# Altium PCB BalanceCarCircuit.PcbDoc
Units mil, origin at the board's own origin, x right, y up, seen from the top; angles counter-clockwise.
Board outline 4000 x 2000 mil, 2 copper layers (Top Layer, Bottom Layer); 6 components, 17 nets, 70 pads, 5 vias.
Unrouted connection lines stored in the file: 5.
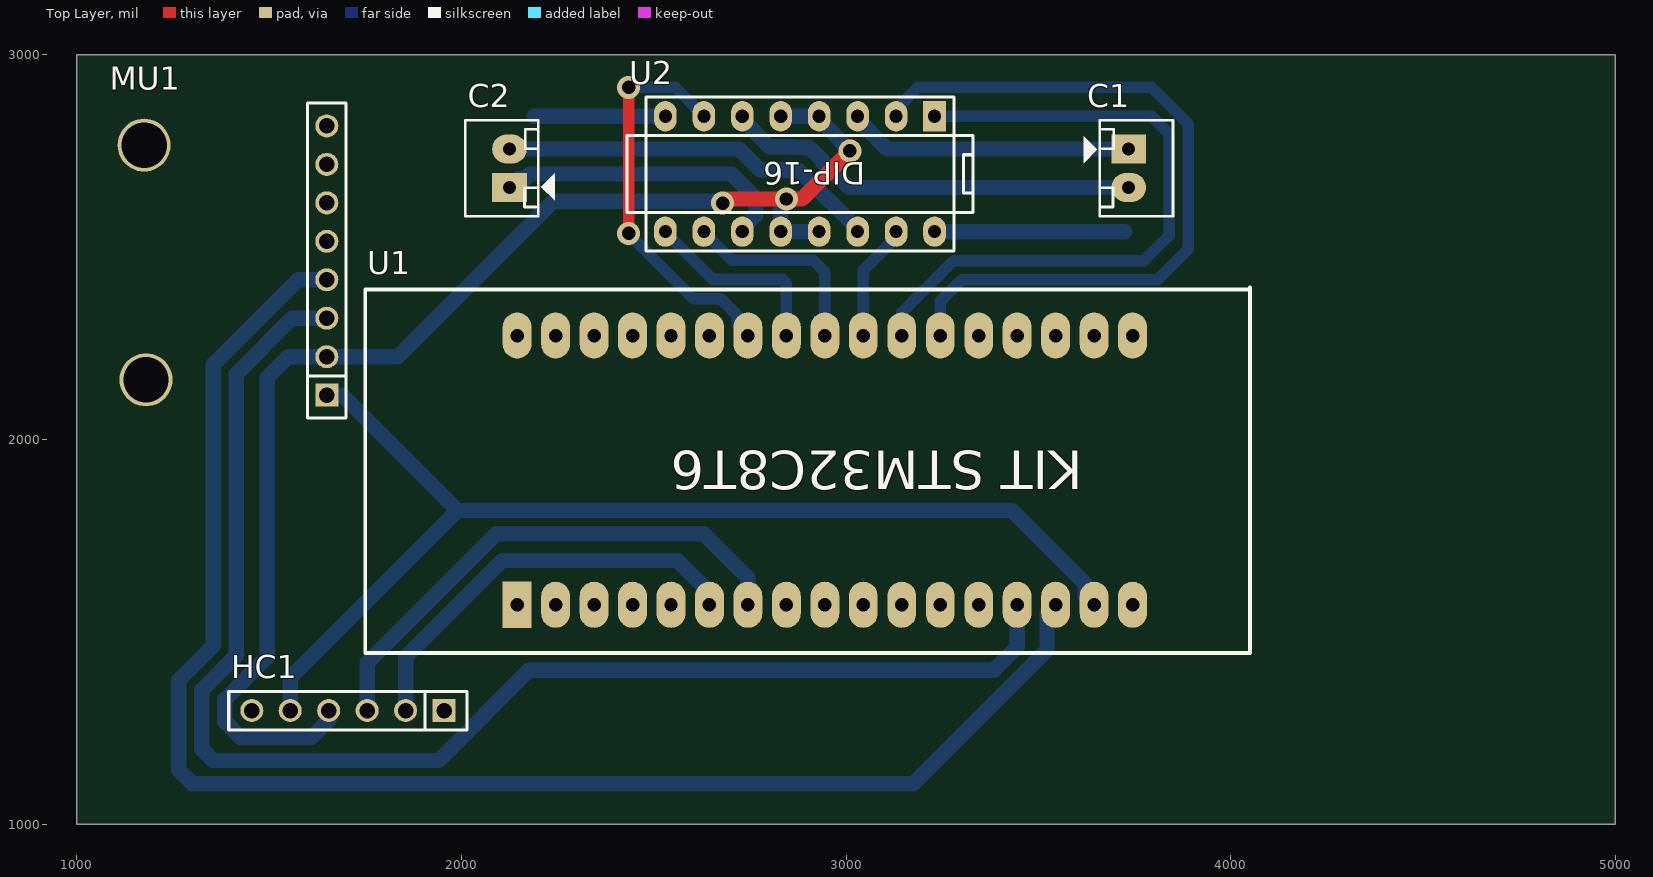
[diagram p0: Top Layer view]
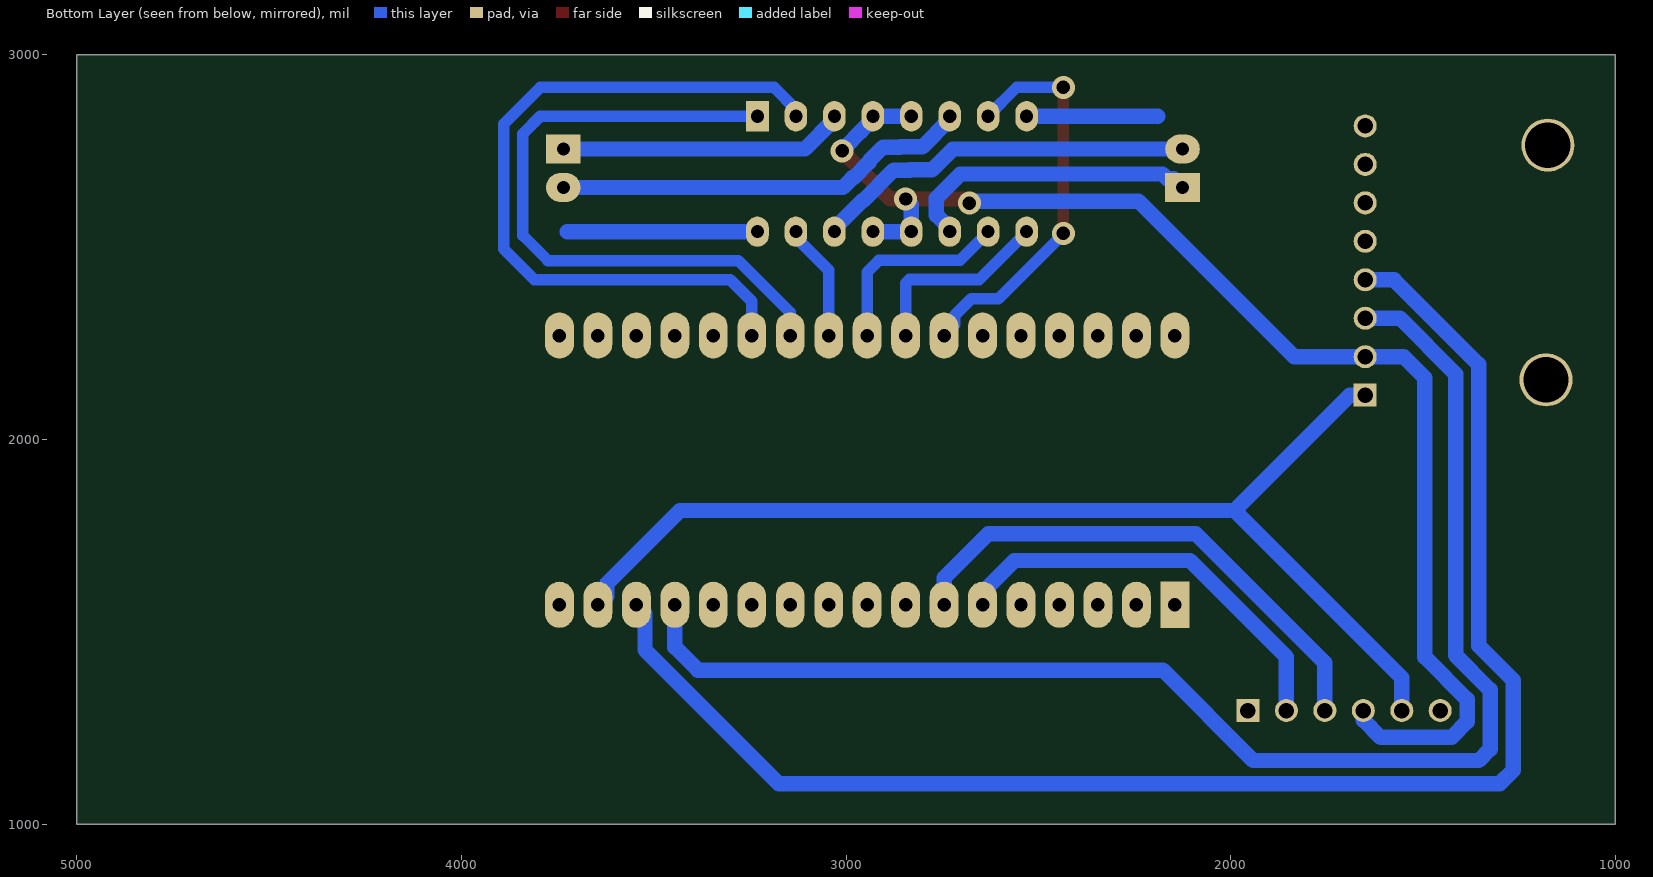
[diagram p1: Bottom Layer view, seen from below]
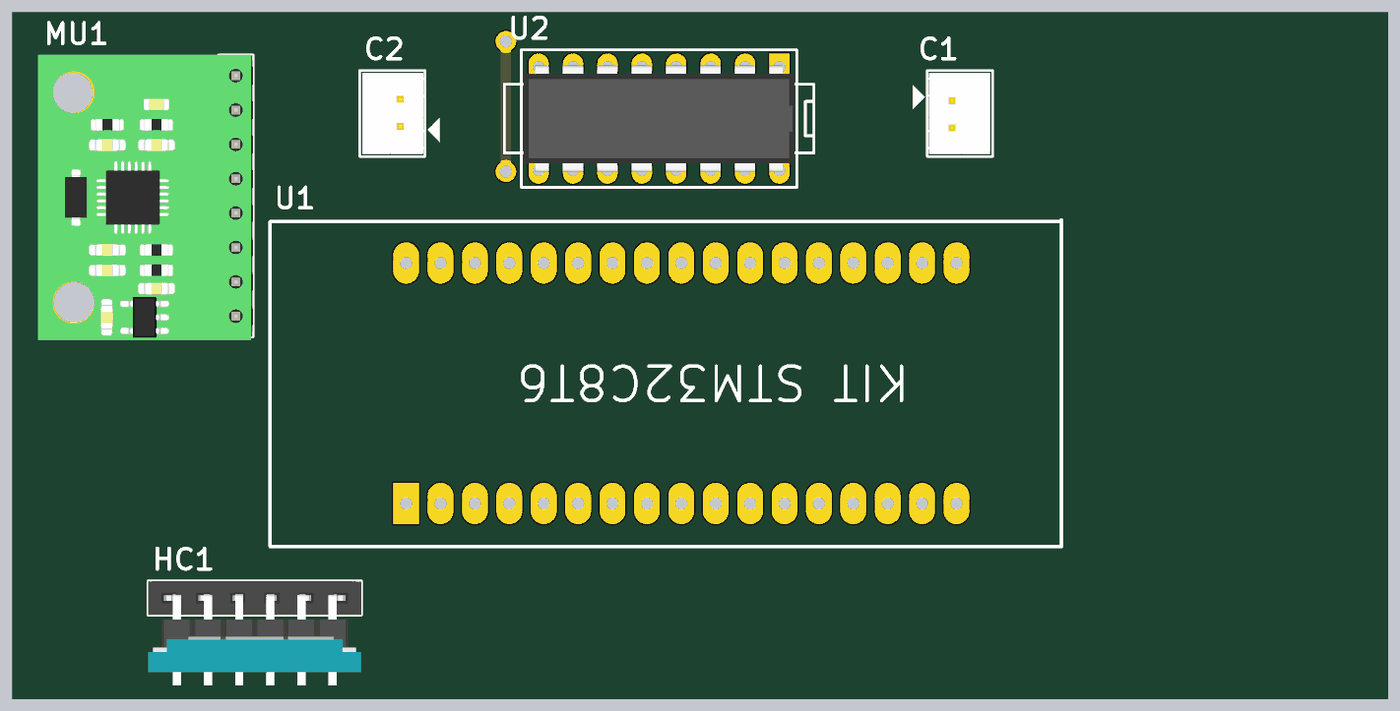
[diagram p2: 3D render of the assembled board from above, using the file's embedded part models]

## Layer stack, top to bottom
Top Solder: solder mask 0.4, Solder Resist, Dk 3.5
Top Layer: signal copper 1.4
Dielectric1: dielectric 12.6, FR-4, Dk 4.8
Bottom Layer: signal copper 1.4
Bottom Solder: solder mask 0.4, Solder Resist, Dk 3.5

## Board outline
1000,1000 5000,1000 5000,3000 1000,3000

## Design rules (kind name [scope] priority, off if disabled: settings)
Clearance [All] p1: gap=20
PolygonConnect [All] p1: connectstyle=Relief reliefconductorwidth=10 reliefentries=4 polygonreliefangle="90 Angle" airgapwidth=10
RoutingVias [All] p1: holewidth=35 width=60 viastyle="Through Hole" minholewidth=35 minwidth=60 maxholewidth=35 maxwidth=60
SilkToSolderMaskClearance SilkscreenOverComponentPads [IsPad] p1: minsilkscreentomaskgap=10 clearancetoexposedcopper=TRUE
SolderMaskExpansion [All] p1: expansion=4
Width [All] p1: maxlimit=50 minlimit=30 preferedwidth=40
29 further rules are at their usual default settings.

## Components (designator, comment, footprint, x,y, rotation, side; value= is the part's Value field where it differs from the comment)
C1 "Header2" Header2 3735,2755 r270 top
C2 "Header2" Header2 2125,2655 r90 top
HC1 "HC06" HC06 1710,1295 r180 top
MU1 "MPU6050" MPU6050 1355,2335 r90 top
U1 "KIT_STM32F103C8T6" "DIP_KIT_STM32F103C8T6 - duplicate" 2145,1570 r90 top
U2 "L293D" DIP16 2880,2690 r180 top

## Footprints (in the part's own frame and the unit in brackets; to place one, negate y for a bottom-side part, rotate by r counter-clockwise, add the part's x,y. Pads: shape width x height; smd on the part's side, far side on the other; paste and mask are expansions set on the pad)
DIP16 [mm]
  rect 1.5x2 hole 0.864: 1(-8.897,-3.812)
  oval 1.5x2 hole 0.864: 2(-6.357,-3.812) 3(-3.817,-3.812) 4(-1.277,-3.812) 5(1.263,-3.812) 6(3.803,-3.812) 7(6.343,-3.812) 8(8.883,-3.812) 9(8.883,3.808) 10(6.343,3.808) 11(3.803,3.808) 12(1.263,3.808) 13(-1.277,3.808) 14(-3.817,3.808) 15(-6.357,3.808) 16(-8.897,3.808)
  silkscreen extent -11.44,-5.08 11.42,5.08, body extent -10,-3.93 10,3.94, height 1.99
"DIP_KIT_STM32F103C8T6 - duplicate" [mil]
  rect 120x75 hole 35: 1(0,0)
  oval 120x75 hole 35: 2(0,-100) 3(0,-200) 4(0,-300) 5(0,-400) 6(0,-500) 7(0,-600) 8(0,-700) 9(0,-800) 10(0,-900) 11(0,-1000) 12(0,-1100) 13(0,-1200) 14(0,-1300) 15(0,-1400) 16(0,-1500) 17(0,-1600) 18(700,-1600) 19(700,-1500) 20(700,-1400) 21(700,-1300) 22(700,-1200) 23(700,-1100) 24(700,-1000) 25(700,-900) 26(700,-800) 27(700,-700) 28(700,-600) 29(700,-500) 30(700,-400) 31(700,-300) 32(700,-200) 33(700,-100) 34(700,0)
  silkscreen extent -125,-1905 825,395
HC06 [mm]
  rect 1.52x1.52 hole 1.02: 1(-6.223,0)
  round 1.52 hole 1.02: 2(-3.683,0) 3(-1.143,0) 4(1.397,0) 5(3.937,0) 6(6.477,0)
  silkscreen extent -7.74,-1.27 8,1.27, body extent -7.74,-1.25 8,6.48, height 46
Header2 [mil] "CON2"
  rect 75x90 hole 34: 1(0,0)
  oval 75x90 hole 34: 2(100,0)
  silkscreen extent -75,-118 175,115, body extent -68,-70 168,107, height 236
MPU6050 [mm]
  rect 1.52x1.52 hole 1.02: 1(-5.588,-7.493)
  round 3.5 hole 3: 2(-4.572,4.445) 2(10.922,4.572)
  round 1.52 hole 1.02: 2(-3.048,-7.493) 3(-0.508,-7.493) 4(2.032,-7.493) 5(4.572,-7.493) 6(7.112,-7.493) 7(9.652,-7.493) 8(12.192,-7.493)
  silkscreen extent -7.11,-8.76 13.71,-6.22, body extent -7.37,-8.76 13.74,7.11, height 14.54

## Part data
C1 C2: "Header IDC, 2 x 1 Pin Vertical 2.54mm Pitch (Non-Boxed, Male)"
U1: "KIT STM32F103C8T6"
U2: "Push-Pull Four Channel Driver With Diode"

## Via types
v1: diameter 60, hole 35, Top Layer to Bottom Layer, 5 vias

## Nets (pads, with @x,y where several pads share a name; then routed paths per layer and width w, separated by ;. In a path a pad name is that pad's centre, name@x,y a point inside that pad or via, vN(x,y) a via of type N, cw(c..) or ccw(c..) an arc to the next point about the centre after c; other vN are vias at no path point)
6V: U2.8 | length 340.4
  Bottom Layer w40: 2189.92,2840.08 U2.8
GND: HC1.4 MU1.2 U1.17 U1.18 U2.4 U2.5 U2.12 U2.13 | length 3436.5
  Top Layer w40: v1(2679.25,2614.25) 2690,2625 v1(2845,2625) ; v1@2839.29,2630.71 v1(2845,2625) ; v1@3010,2760.71 v1@3010,2752.39 ; v1(2845,2625) 2885,2625 v1(3010,2750) ; v1(3010,2750) v1@3010,2752.39 ; v1(3010,2750) 3010.71,2750.71 3011.68,2750.71 v1@3010,2752.39
  Bottom Layer w40: HC1.4@1655,1270 1610.08,1225.08 1425,1225.08 1425,1226.12 1385.08,1266.04 1385.08,1323.96 1495,1433.88 1495,2160 1550,2215 1650,2215 1835,2215 2239.45,2619.45 2674.05,2619.45 v1(2679.25,2614.25) ; v1@2830.29,2610.29 U2.12 U2.13 ; U2.5 U2.4 2930.29,2832.09 2960.77,2801.62 2960.77,2801.44 3001.5,2760.71 3001.68,2760.71 v1@3010,2752.39 ; v1(3010,2750) v1@3010,2752.39 ; v1@3010,2760.71 v1@3010,2752.39 ; v1@3011.68,2750.71 v1@3010,2752.39
M1_1A: U1.23 U2.2 | length 1956.4
  Bottom Layer w30: U2.2 3130.29,2858.47 3186.82,2915 3795,2915 3890,2820 3890,2495 3810,2415 3300.71,2415 3245,2359.29 U1.23
M1_2A: U1.28 U2.7 | length 1063.6
  Top Layer w30: v1(2435,2535.73) v1(2435,2915)
  Bottom Layer w30: v1(2435,2535.73) 2434.27,2535 2603.57,2365.71 2674.32,2365.71 2717.5,2322.53 2717.5,2297.5 U1.28 ; v1(2435,2915) 2435,2900 2450,2915 2556.47,2915 2630.29,2841.17 U2.7
M1_E: U1.24 U2.1 | length 1731.2
  Bottom Layer w30: U1.24 3145,2330 3280,2465 3775,2465 3840,2530 3840,2795 3794.92,2840.08 U2.1
M1_OUT1: C1.1 U2.3 | length 756.7
  Bottom Layer w40: U2.3 3038.92,2840.08 3030.52,2831.68 3107.2,2755 C1.1
M1_OUT2: C1.2 U2.6 | length 1079.4
  Bottom Layer w40: U2.6@2730.29,2831.91 2801.5,2760.71 2859.09,2760.71 2859.8,2760 2903.39,2760 2940,2723.39 2940,2721.01 2981.01,2680 2983.39,2680 3008.39,2655 C1.2
M2_1A: U1.26 U2.10 | length 523.9
  Bottom Layer w30: U2.10 2630.29,2538.98 2703.57,2465.71 2914.29,2465.71 2945,2435 U1.26
M2_2A: U1.25 U2.15 | length 305.4
  Bottom Layer w30: U1.25 3045,2440 3130.29,2525.29 U2.15
M2_E: U1.27 U2.9 | length 506.7
  Bottom Layer w30: U2.9 2530.29,2538.98 2653.57,2415.71 2835,2415.71 2845,2405.71 U1.27
M2_OUT1: C2.1 U2.11 | length 774
  Bottom Layer w40: C2.1 2147.5,2677.5 2164.6,2677.5 2177.1,2690 2702.5,2690 2765,2627.5 2765,2582.95 U2.11@2730.29,2548.25
M2_OUT2: C2.2 U2.14 | length 999.1
  Bottom Layer w40: C2.2 2722.35,2755 2776.64,2700.71 2834.24,2700.71 2834.95,2700 2876.15,2700 2956.15,2620 2958.54,2620 3030.29,2548.25 U2.14
RX: HC1.3 U1.7 | length 1370.8
  Bottom Layer w40: HC1.3 1755,1418.92 2091.08,1755 2630,1755 2745,1640 U1.7
SCL: MU1.3 U1.14 | length 3672
  Bottom Layer w40: MU1.3 1559.85,2315 1415,2170.15 1415,1438.74 1325.08,1348.82 1325.08,1194.79 1354.79,1165.08 1941.49,1165.08 2176.41,1400 3385,1400 3445,1460 U1.14
SDA: MU1.4 U1.15 | length 4020.8
  Bottom Layer w40: MU1.4 1575,2415 1355,2195 1355,1463.59 1265.08,1373.67 1265.08,1140.23 1300.23,1105.08 3174.93,1105.08 3522.5,1452.65 3522.5,1547.5 U1.15
TX: HC1.2 U1.6 | length 1099.4
  Bottom Layer w40: HC1.2 1855,1434.07 2105.93,1685 2562.1,1685 2645,1602.1 U1.6
VCC: HC1.5 MU1.1 U1.16 U2.16 | length 3434.4
  Bottom Layer w40: HC1.5 1555,1380 1990,1815 ; MU1.1 1690,2115 1990,1815 ; U2.16 3724.92,2540.08 ; U1.16 3622.5,1592.5 3622.5,1624.6 3432.1,1815 1990,1815
pads on no net: HC1.1 HC1.6 MU1.5 MU1.6 MU1.7 MU1.8 U1.1 U1.2 U1.3 U1.4 U1.5 U1.8 U1.9 U1.10 U1.11 U1.12 U1.13 U1.19 U1.20 U1.21 U1.22 U1.29 U1.30 U1.31 U1.32 U1.33 U1.34

## Text inside footprints (layer, text, board x,y; h text height)
U1: Top Overlay "KIT STM32C8T6" at 3615,1970 h100 r180
U2: Top Overlay "DIP-16" at 3050.29,2720.08 h59.05 r180